# Altium PCB 噪声监测仪.PcbDoc
Units mil, origin at the board's own origin, x right, y up, seen from the top; angles counter-clockwise.
Board outline 6000 x 4000 mil, 2 copper layers (Top Layer, Bottom Layer); 47 components, 64 nets, 190 pads, 7 vias.
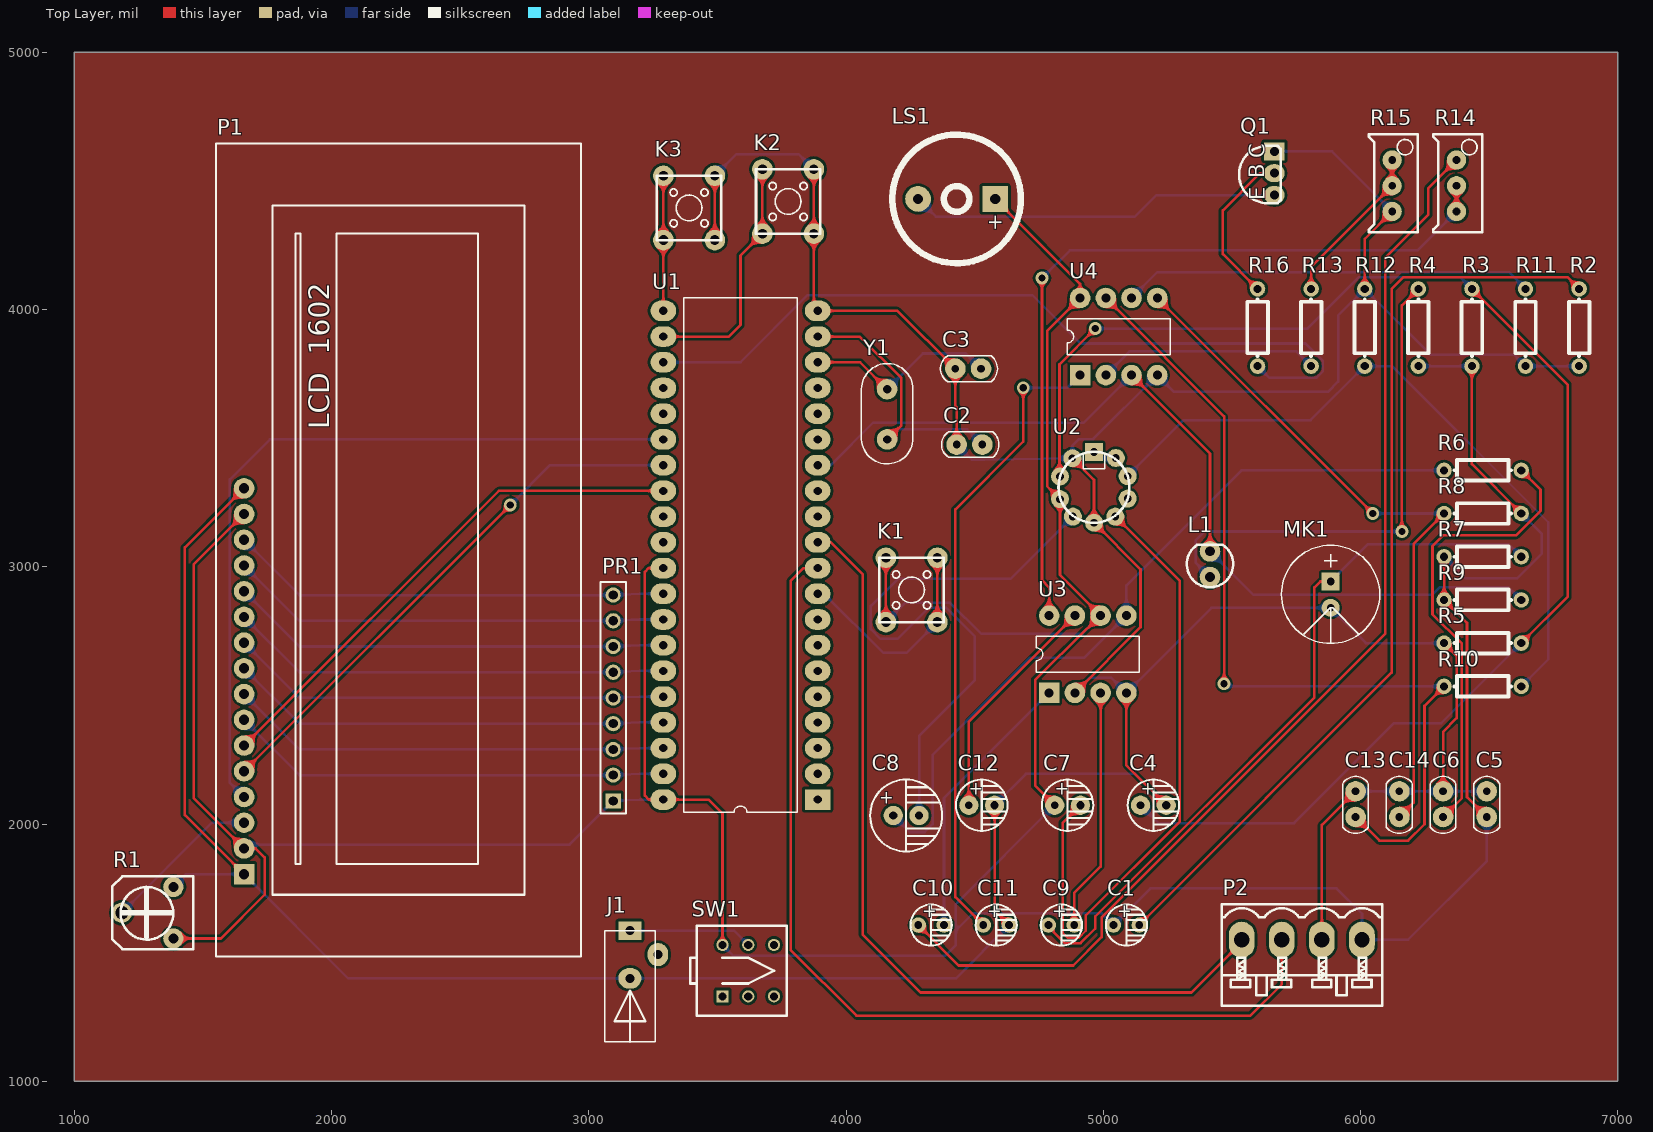
[diagram p0: Top Layer view]
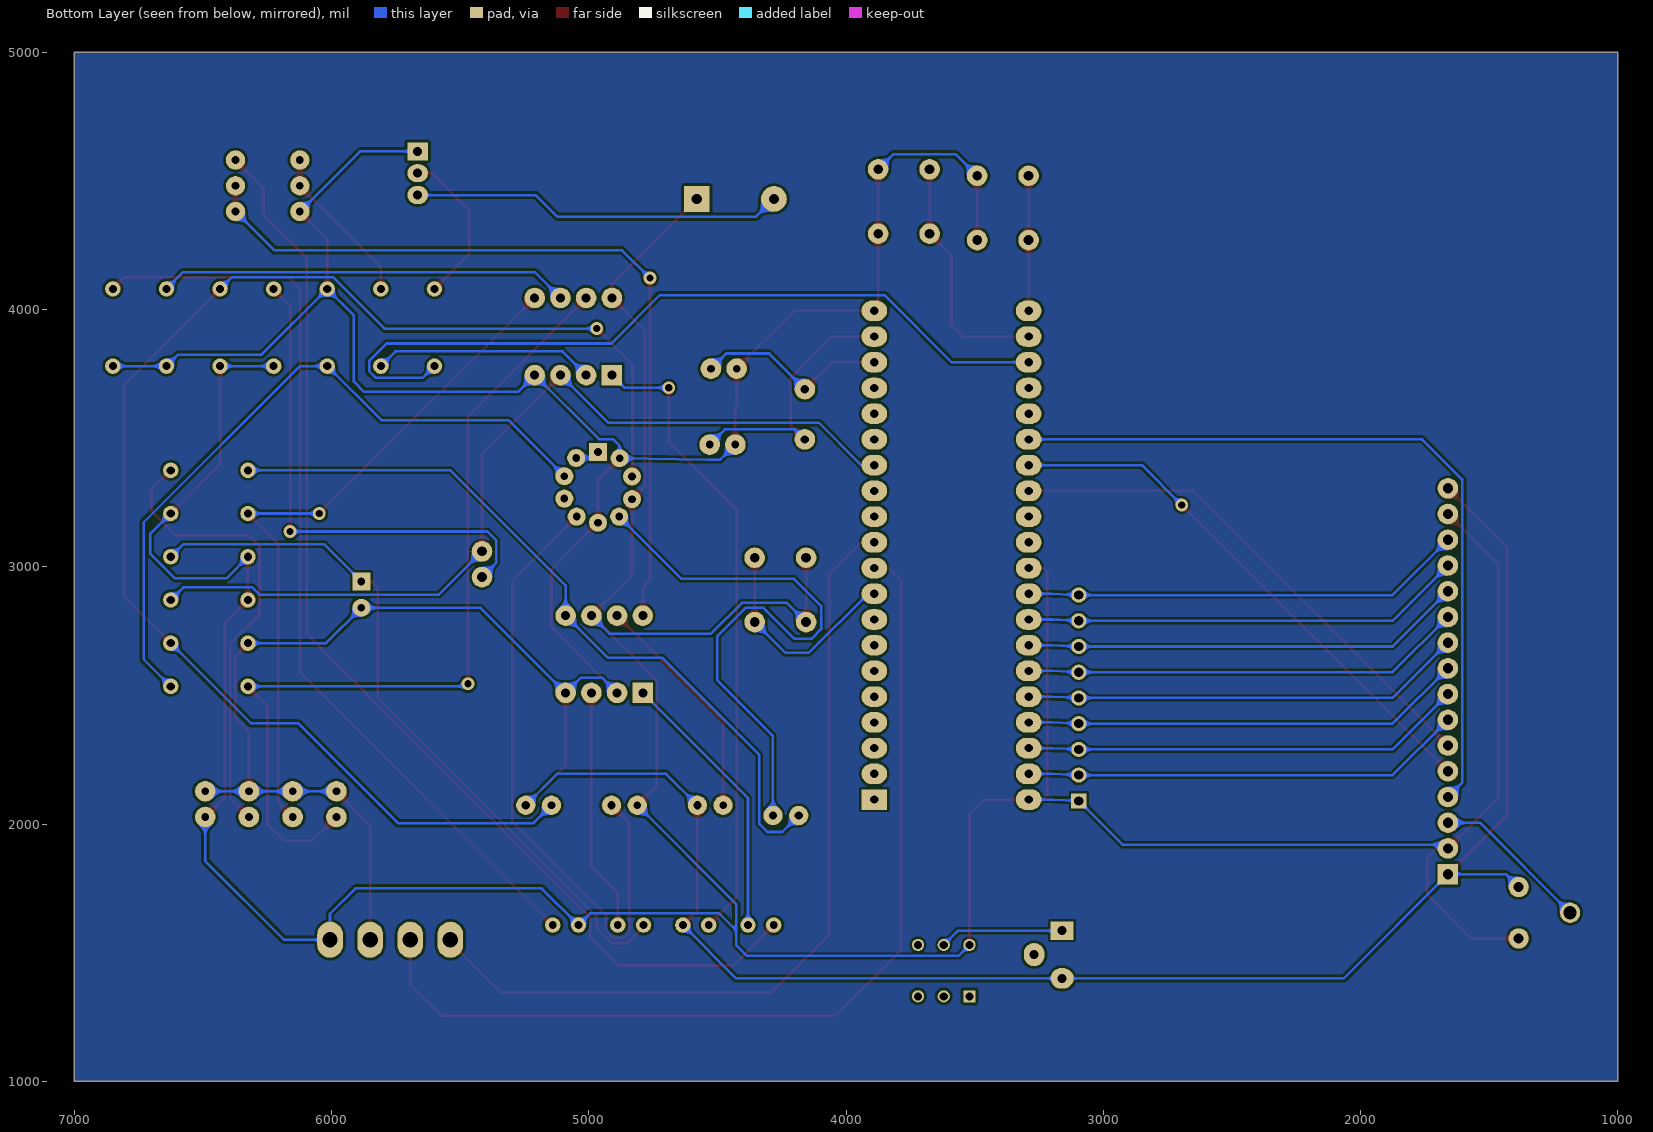
[diagram p1: Bottom Layer view, seen from below]

## Layer stack, top to bottom
Top Solder: solder mask 0.4, Solder Resist, Dk 3.5
Top Layer: signal copper 1.4
Dielectric 1: dielectric 12.6, FR-4, Dk 4.8
Bottom Layer: signal copper 1.4
Bottom Solder: solder mask 0.4, Solder Resist, Dk 3.5

## Board outline
1000,1000 7000,1000 7000,5000 1000,5000

## Design rules (kind name [scope] priority, off if disabled: settings)
Clearance [All] p1: gap=10 ignorepadtopadclearanceinfootprint=FALSE except(0: Arc-Hole Track-Hole SMDPad-Hole THPad-Hole Via-Hole Fill-Hole Poly-Hole Region-Hole Text-Hole)
PolygonConnect [All] p1: connectstyle=Relief reliefconductorwidth=10 reliefentries=4 polygonreliefangle="90 Angle" airgapwidth=10
RoutingVias [All] p1: holewidth=28 width=50 viastyle="Through Hole" minholewidth=28 minwidth=50 maxholewidth=28 maxwidth=50
SolderMaskExpansion [All] p1: expansion=4
Width [All] p1: maxlimit=10 minlimit=10 preferedwidth=10
30 further rules are at their usual default settings.

## Components (designator, comment, footprint, x,y, rotation, side; value= is the part's Value field where it differs from the comment)
C1 "10uF" CAP2 5106.06,1599.25 r0 top
C2 "30p" CAPNORM 4480,3470 r180 top value=33p
C3 "30p" CAPNORM 4475,3765 r180 top value=33p
C4 "1uF" CAP3 5180,2062.87 r0 top
C5 "104" CAPNORM 6486.06,2077.13 r90 top
C6 "473" CAPNORM 6316.06,2077.13 r90 top
C7 "1uF" CAP3 4846.31,2062.87 r0 top
C8 "220uF" CAP4 4235,2040 r0 top
C9 "10uF" CAP2 4853.08,1599.25 r0 top
C10 "10uF" CAP2 4347.13,1599.25 r0 top
C11 "1UF" CAP2 4600.1,1599.25 r0 top
C12 "100uF" CAP3 4512.62,2062.87 r0 top
C13 "104" CAPNORM 5976.06,2077.13 r90 top
C14 "103" CAPNORM 6146.06,2077.13 r90 top
J1 "PWR2.5" PWR5V 3110,1400 r90 top
K1 "SW-AJ" KaiGuan 4245,2915 r90 top
K2 "SW-AJ" KaiGuan 3765,4425 r90 top
K3 "SW-AJ" KaiGuan 3380,4400 r90 top
L1 "LED" LED 5415,3010 r0 top
LS1 "Bell" FengMing 4480,4555 r0 top
MK1 "Mic2" MK1 5885,2895 r0 top
P1 "LCD1602" 1602 2756.81,2949.68 r90 top
P2 "Header 4" HT396K-4 5772.05,1550 r0 top
PR1 "8位排阻" HDR1X9 3095,2090 r90 top
Q1 "8550" SANJIGUAN 5605,4535 r0 top
R1 "" DIANWEIQI 1277.17,1653.27 r90 top value=10K
R2 "10K" AXIAL-0.3 6850,3780 r90 top
R3 "20K" AXIAL-0.3 6433.33,3780 r90 top
R4 "330" AXIAL-0.3 6225,3780 r90 top value=1K
R5 "10K" AXIAL-0.3 6625,2703 r180 top
R6 "10" AXIAL-0.3 6625,3375 r180 top
R7 "100K" AXIAL-0.3 6625,3039 r180 top
R8 "6.8K" AXIAL-0.3 6625,3207 r180 top
R9 "10K" AXIAL-0.3 6625,2871 r180 top
R10 "100K" AXIAL-0.3 6625,2535 r180 top
R11 "100K" AXIAL-0.3 6641.67,3780 r90 top
R12 "10K" AXIAL-0.3 6016.67,3780 r90 top
R13 "22K" AXIAL-0.3 5808.33,3780 r90 top
R14 "100K" Bianzuqi 6311.06,4547.13 r90 top
R15 "10K" Bianzuqi 6061.06,4547.13 r90 top
R16 "1K" AXIAL-0.3 5600,3780 r90 top
SW1 "SW-6P" SW-6P 3520,1330 r90 top
U1 "STC89C52" 52DANPIANJi 3555,3045 r90 top
U2 "AD536" AD536 4965.06,3311.13 r0 top
U3 "LM386" LM386 4877.87,2351.06 r90 top
U4 "LM331AN" LM331AN 4826.06,3937.13 r0 top
Y1 "12M" JINGZHEN 4155,3630 r0 top

## Footprints (in the part's own frame and the unit in brackets; to place one, negate y for a bottom-side part, rotate by r counter-clockwise, add the part's x,y. Pads: shape width x height; smd on the part's side, far side on the other; paste and mask are expansions set on the pad)
52DANPIANJi [mil]
  rect 80x100 hole 32: 1(-950,-335)
  oval 80x100 hole 32: 2(-850,-335) 3(-750,-335) 4(-650,-335) 5(-550,-335) 6(-450,-335) 7(-350,-335) 8(-250,-335) 9(-150,-335) 10(-50,-335) 11(50,-335) 12(150,-335) 13(250,-335) 14(350,-335) 15(450,-335) 16(550,-335) 17(650,-335) 18(750,-335) 19(850,-335) 20(950,-335) 21(950,265) 22(850,265) 23(750,265) 24(650,265) 25(550,265) 26(450,265) 27(350,265) 28(250,265) 29(150,265) 30(50,265) 31(-50,265) 32(-150,265) 33(-250,265) 34(-350,265) 35(-450,265) 36(-550,265) 37(-650,265) 38(-750,265) 39(-850,265) 40(-950,265)
  silkscreen extent -1000,-255 1000,185
1602 [mil]
  rect 80x80 hole 40: 1(-1144.68,1096.81)
  round 80 hole 40: 2(-1044.68,1096.81) 3(-944.69,1096.81) 4(-844.69,1096.81) 5(-744.69,1096.81) 6(-644.69,1096.81) 7(-544.69,1096.81) 8(-444.69,1096.81) 9(-344.69,1096.81) 10(-244.69,1096.81) 11(-144.69,1096.81) 12(-44.69,1096.81) 13(55.31,1096.81) 14(155.31,1096.81) 15(255.31,1096.81) 16(355.31,1096.81)
  silkscreen extent -1465,-213 1695,1207
AD536 [mil]
  round 70 hole 30 unplated: 1(-85.06,110.87) 2(-133.06,39.87) 3(-133.06,-48.13) 4(-83.06,-116.13) 5(-1.06,-139.92) 6(81.94,-116.13) 7(129.94,-46.13) 8(129.94,40.87) 9(83.94,111.87)
  rect 70x70 hole 30 unplated: 10(-1.06,134.87)
  silkscreen extent -139,-140 137,136
AXIAL-0.3 [mil]
  round 60 hole 31.5: 1(0,0) 2(300,0)
  silkscreen extent 40,-40 260,40
Bianzuqi [mil]
  round 75 hole 30: 1(33.94,-62.13) 2(-66.06,-62.13) 3(-166.06,-62.13)
  silkscreen extent -246,-162 134,28
CAP2 [mil]
  round 60 hole 30: 1(-66.06,7.87) 2(33.94,7.87)
  silkscreen extent -96,-72 64,88
CAP3 [mil]
  round 75 hole 30: 1(-35,10)
  round 75 hole 32: 2(65,10)
  silkscreen extent -85,-90 115,110
CAP4 [mil]
  round 75 hole 32: 1(-51.06,-7.13) 2(48.94,-7.13)
  silkscreen extent -141,-147 139,133
CAPNORM [mil]
  round 80 hole 30: 1(50,-5) 2(-50,-5)
  silkscreen extent -114,-55 108,45
DIANWEIQI [mm]
  round 2 hole 1: 1(-2.496,-2.739) 3(2.584,-2.739)
  round 2 hole 1.3: 2(0.044,2.341)
  silkscreen extent -3.56,-4.7 3.64,3.3
FengMing [mil]
  rect 100x100 hole 40: 1(100,-125)
  round 100 hole 40: 2(-200,-125)
  silkscreen extent -300,-375 200,125
HDR1X9 [mm] "Connector; Header; 9 Position"
  rect 1.5x1.5 hole 0.9: 1(0,0)
  round 1.5 hole 0.9: 2(2.54,0) 3(5.08,0) 4(7.62,0) 5(10.16,0) 6(12.7,0) 7(15.24,0) 8(17.78,0) 9(20.32,0)
  silkscreen extent -1.27,-1.27 21.59,1.27
HT396K-4 [mil]
  oval 100x140 hole 60: 1(-233.86,0) 2(-77.95,0) 3(77.95,0) 4(233.86,0)
  silkscreen extent -312,-256 312,138
JINGZHEN [mil]
  round 80 hole 32: 1(5,60) 2(5,-135)
  silkscreen extent -95,-230 105,160
KaiGuan [mil]
  round 80 hole 38: 1(-130,-110) 1(120,-110) 2(-130,90) 2(120,90)
  silkscreen extent -130,-135 120,115
LED [mil]
  round 80 hole 38: 1(0,-50) 2(0,50)
  silkscreen extent -90,-90 90,75
LM331AN [mil]
  rect 80x80 hole 35: 1(83.94,-192.13)
  round 80 hole 35: 2(183.94,-192.13) 3(283.94,-192.13) 4(383.94,-192.13) 5(383.94,107.87) 6(283.94,107.87) 7(183.94,107.87) 8(83.94,107.87)
  silkscreen extent 34,-112 434,28
LM386 [mil]
  rect 80x80 hole 35: 1(158.94,87.87)
  round 80 hole 35: 2(158.94,-12.13) 3(158.94,-112.13) 4(158.94,-212.13) 5(458.94,-212.13) 6(458.94,-112.13) 7(458.94,-12.13) 8(458.94,87.87)
  silkscreen extent 239,-262 379,138
MK1 [mil]
  rect 70x70 hole 30: 1(-1.06,47.87)
  round 70 hole 30: 2(-1.06,-54.49)
  silkscreen extent -192,-193 190,189
PWR5V [mil]
  rect 70.87x90 hole 35: 1(185.22,-50)
  oval 80x90 hole 35: 2(0,-50)
  oval 90x80 hole 35: 3(92.52,-158.82)
  silkscreen extent -247,-148 185,48
SANJIGUAN [mil]
  oval 80x70 hole 35: 1(60,-90) 2(60,-5)
  rect 80x70 hole 35: 3(60,80)
  silkscreen extent -77,-122 85,102
SW-6P [mm]
  rect 1.2x1.2 hole 0.8: 1(0,0)
  round 1.2 hole 0.8: 2(0,-2.54) 3(0,-5.08) 4(5.08,-5.08) 5(5.08,-2.54) 6(5.08,0)
  silkscreen extent -1.91,-6.35 6.98,3.18

## Part data
C1 C4 C7 C8 C9 C10 C11 C12: library part C+
  C1 C9: =10uF
  C4 C7: =1uf
  C8: =220uF
  C10: =10uf
  C11: =1UF
  C12: =100uF
C2 C3 C5 C6 C13 C14: library part CAP
  C5 C13: =104
  C6: =473
  C14: =103
J1: "Low Voltage Power Supply Connector", ComponentLink1Description="Manufacturer Link", ComponentLink1URL=http://domino.kycon.com/internet/Products.html, DatasheetDocument=09-May-2002, Published=17-Dec-2003, Publisher="Altium Limited"
LS1: "Electrical Bell", Manufacturer="Generic Components", Published=1999
MK1: "Microphone", LatestRevisionDate=17-Jul-2002, LatestRevisionNote="Re-released for DXP Platform.", PackageReference=PIN2, Published=24-Mar-1999, Publisher="Altium Limited"
P2: "Header, 4-Pin", LatestRevisionDate=17-Jul-2002, LatestRevisionNote="Re-released for DXP Platform.", Publisher="Altium Limited"
Q1: library part 2N3906, "PNP General Purpose Amplifier", ComponentLink1Description="Manufacturer Link", ComponentLink1URL=http://www.fairchildsemi.com/, ComponentLink2Description=Datasheet, ComponentLink2URL=http://www.fairchildsemi.com/ds/2N%2F2N3906.pdf, DatasheetVersion=1997, LatestRevisionDate=15-Jan-2003, LatestRevisionNote="PCB Footprint 'BCY-W3/D4.7' replaced", PackageDescription="TO, Flat Index; 3 In-Line, Axial Leads; Body Dia. 4.5mm; Leads 0.51 x 0.48 mm (max)", PackageReference=TO-92A, PackageVersion=Sep-1998, Published=8-Jun-2000, Publisher="Altium Limited"
R1 R14 R15: library part RPot, "Potentiometer", LatestRevisionDate=17-Jul-2002, LatestRevisionNote="Re-released for DXP Platform.", PackageDescription="Variable Resistor, Thru-Hole; 3 Leads", PackageReference=VR5, Published=8-Jun-2000, Publisher="Altium Limited", Set Position=0.5, Sim Note="Enter the Resistance value and the set point into parameter fields."
R2 R4 R16: library part Res2, "Resistor", LatestRevisionDate=17-Jul-2002, LatestRevisionNote="Re-released for DXP Platform.", PackageReference=AXIAL-0.4, Published=8-Jun-2000, Publisher="Altium Limited"
R3 R5 R6 R7 R12: library part RES0.4
  R3: =20K
  R5 R12: =10K
  R6: =10
  R7: =100K
R8 R9 R10 R11 R13: library part 电阻
  R8: =6.8K
  R9: =10K
  R10 R11: =100K
  R13: =22K
U1: library part AT89S52_1
U2: library part AD536A
U3: library part LM386M-1, "Low-Voltage Audio Power Amplifier", Code_IPC=SOIC127P600-8, Code_JEDEC=MS-012-AA, ComponentLink1Description="Manufacturer Link", ComponentLink1URL=http://www.national.com/, ComponentLink2Description=Datasheet, ComponentLink2URL=http://www.national.com/ds.cgi/LM/LM386.pdf, ComponentLink3Description="URL Link1", ComponentLink3URL=http://www.national.com/pf/LM/LM386.html, DatasheetVersion=Sep-1997, LatestRevisionDate=13-Apr-2006, LatestRevisionNote="IPC-7351 Footprint Added.", PackageDescription="8-Pin Small Outline Integrated Circuit 1.27 mm Pitch", PackageReference=M08A, PackageVersion=Sep-1997, Published=15-Apr-2002, Publisher="Altium Limited"
U4: "Precision Voltage-to-Frequency Converter", ComponentLink1Description="Manufacturer Link", ComponentLink1URL=http://www.national.com/, ComponentLink2Description=Datasheet, ComponentLink2URL=http://www.national.com/ds.cgi/LM/LM231.pdf, ComponentLink3Description="URL Link1", ComponentLink3URL=http://www.national.com/pf/LM/LM331.html, DatasheetVersion=Jun-1999, LatestRevisionDate=06-Jun-2005, LatestRevisionNote="Stylized 3D Model Added.", Note="Metal case is connected to pin 4 (Ground)", PackageDescription="DIP; 8 Leads; Row Spacing 7.62 mm; Pitch 2.54 mm", PackageReference=N08E, PackageVersion=Sep-1997, Published=15-Apr-2002, Publisher="Altium Limited"
Y1: library part XTAL, "Crystal Oscillator", Manufacturer="Generic Components", Class=Oscillator, Published=08/06/2000, Publisher="Altium Hobart Technology Centre", SubClass="Crystal Oscillator"

## Via types
v1: diameter 50, hole 28, Top Layer to Bottom Layer, 7 vias

## Nets (pads, with @x,y where several pads share a name; then routed paths per layer and width w, separated by ;. In a path a pad name is that pad's centre, name@x,y a point inside that pad or via, vN(x,y) a via of type N, cw(c..) or ccw(c..) an arc to the next point about the centre after c; other vN are vias at no path point)
ALE: U1.30
GND: C2.1 C3.1 C4.2 C5.1 C6.1 C11.2 C12.2 C13.1 C14.1 J1.2 K2.1 K3.1 MK1.2 P1.1 P1.16 P2.3 Q1.3 R1.3 R2.1 R5.2 R11.1 R12.2 R15.3 U1.20 U2.1 U2.5 U3.2 U3.4 U4.4 | length 17696.3
  Top Layer w10: P1.1 1430,2035 1430,3075 P1.16 ; K3.1@3490,4270 K3.1@3490,4520 ; K2.1@3875,4545 3875,4295 3875,3995 U1.20 4200,3995 C3.1 4425,3625 4430,3620 C2.1 ; C12.2 4577.62,1663.54 C11.2 ; U2.1 4964,3338 U2.5 5145,2990.2 5145,2765 U3.2 ; U3.4 5090,2227.87 C4.2 ; P2.3 5850,1996.06 C13.1 ; R12.2 6016.67,4274.54 R15.3 ; C6.1 6321.06,2358.36 6374,2411.3 6374,2654 R5.2
  Bottom Layer w10: R1.3 1435,1805 P1.1 2065,1400 J1.2 4426.92,1400 C11.2 ; K3.1@3490,4520 3574,4604 3816,4604 K2.1@3875,4545 ; C2.1 4489,3416 4539,3416 U2.1 4880,3471 4905,3496 4961,3496 U4.4 5275,3680 5873,3680 5913,3720 5913,3976.33 R12.2 6271.67,3825 6596.67,3825 R11.1 R2.1 ; C12.2 4699.75,2195 5122.87,2195 C4.2 ; U3.2 4949,2569 5031,2569 U3.4 5420.51,2840.51 MK1.2 6021.45,2703 R5.2 ; Q1.3 5889.25,4615 R15.3 ; C13.1 C14.1 C6.1 C5.1
NetC1_2: C1.2 R2.2 | length 3646.3
  Top Layer w10: C1.2 6121,2588.13 6121,4080 6167,4126 6804,4126 R2.2
NetC4_1: C4.1 R3.2 R5.1 U2.2 | length 5604.4
  Top Layer w10: U2.2 4832,3372 4830,3372 4830,3787 v1(4969,3926) ; R3.2 6805,3708.33 6805,2883 R5.1
  Bottom Layer w10: v1(4969,3926) 5794,3926 5993,4125 6388.33,4125 R3.2 ; C4.1 5214.87,2003 5742,2003 6131,2392 6314,2392 R5.1
NetC6_2: C6.2 R6.1 | length 1796.1
  Top Layer w10: C6.2 6394,2100.06 6394,2701 6280,2815 6280,3080 6323,3123 6606,3123 6700,3217 6700,3300 R6.1
NetC7_2: C7.2 U2.6 | length 2500
  Top Layer w10: C7.2 4842,2003.56 4842,1577 4862,1557 4904,1557 4932.02,1585.02 4932.02,1644.6 5298,2010.57 5298,2944 U2.6
NetC8_1: C8.1 R6.2 U3.5 | length 2976
  Bottom Layer w10: C8.1 4247.81,1969 4306,1969 4337,2000 4337,2268 4716,2647 4927,2647 U3.5 5090,2928 5537,3375 R6.2
NetC8_2: C8.2 U2.4 | length 2319.4
  Bottom Layer w10: C8.2 4283.94,2342 4500,2558.06 4500,2730 4390,2840 4320,2840 4200,2720 4135,2720 4097,2758 4097,2848 4202,2953 4640,2953 U2.4
NetC9_1: C9.1 MK1.1 R7.1 | length 2811.8
  Top Layer w10: C9.1 4807,1587.15 4807,1580 4850,1537 4912.29,1537 4969,1593.71 4969,1640.29 5821,2492.29 5821,2920 5843.87,2942.87 MK1.1
  Bottom Layer w10: MK1.1 6029.06,3088 6576,3088 R7.1
NetC9_2: C9.2 U3.3 | length 945.5
  Top Layer w10: C9.2 4887.02,1731 4990,1833.98 U3.3
NetC10_1: C10.1 R14.1 | length 4415.6
  Top Layer w10: C10.1 4438.19,1450 4883.43,1450 4993.43,1560 4993.43,1636.43 6097,2740 6097,4203 6264,4370 6264,4471.87 R14.1
NetC10_2: C10.2 U3.1 | length 1072.3
  Bottom Layer w10: C10.2 4381.06,2101.06 U3.1
NetC11_1: C11.1 U4.1 | length 2484.7
  Top Layer w10: C11.1 4425,1716.17 4425,3223 4689,3487 v1(4689,3696)
  Bottom Layer w10: v1(4689,3696) 4861,3696 U4.1
NetC12_1: C12.1 U3.7 | length 907.9
  Top Layer w10: C12.1 4477.62,2397.62 U3.7
NetC13_2: C13.2 R10.2 U4.7 | length 3449.8
  Top Layer w10: U4.7 5470,3585 v1(5470,2545) ; C13.2 6073.19,1935 6185,1935 6249,1999 6249,2459 R10.2
  Bottom Layer w10: v1(5470,2545) 5480,2535 R10.2
NetC14_2: C14.2 R8.2 U4.5 | length 2714
  Top Layer w10: U4.5 v1(6048,3207) ; C14.2 6207,2083.06 6207,3089 R8.2
  Bottom Layer w10: v1(6048,3207) R8.2
NetJ1_1: J1.1 SW1.5 | length 482.9
  Bottom Layer w10: J1.1 3564.78,1585.22 SW1.5
NetL1_1: L1.1 R4.2 | length 1951.2
  Top Layer w10: v1(6161,3137) 6161,4016 R4.2
  Bottom Layer w10: L1.1 5359,3016 5359,3102 5394,3137 v1(6161,3137)
NetLS1_2: LS1.2 Q1.1 | length 1448.4
  Bottom Layer w10: LS1.2 4349,4361 5123,4361 5207,4445 Q1.1
NetP1_3: P1.3 R1.2 | length 620
  Bottom Layer w10: R1.2 1535,2005 P1.3
NetQ1_2: Q1.2 R16.2 | length 621
  Top Layer w10: R16.2 5465,4215 5465,4385 5610,4530 Q1.2
NetR10_1: R10.1 R12.1 U2.8 | length 2745.2
  Bottom Layer w10: U2.8 5312.67,3569.67 5806.33,3569.67 R12.1 6123,3780 6730,3173 6730,2640 R10.1
NetR11_2: R11.2 U4.6 | length 1600
  Bottom Layer w10: U4.6 5210,4145 6576.67,4145 R11.2
NetR13_1: R13.1 U4.2 | length 860.1
  Bottom Layer w10: U4.2 5102,3837 5751.33,3837 R13.1
NetR13_2: R13.2 R15.1 R15.2 | length 631.5
  Top Layer w10: R13.2 5808.33,4166.21 R15.2 R15.1
NetR14_2: R14.2 R14.3 U3.8 | length 3142.1
  Top Layer w10: v1(4762,4122) 4762,2948 4790,2920 U3.8 ; R14.3 R14.2
  Bottom Layer w10: v1(4762,4122) 4870,4230 6222.13,4230 R14.3
NetU2_9: U2.9 U2.10 | length 94.5
  Bottom Layer w10: U2.10 4987,3423 U2.9
P00: P1.7 PR1.2 U1.39 | length 1719.2
  Bottom Layer w10: P1.7 1875,2190 PR1.2 3198,2195 U1.39
P01: P1.8 PR1.3 U1.38 | length 1719.2
  Bottom Layer w10: P1.8 1875,2290 PR1.3 3198,2295 U1.38
P02: P1.9 PR1.4 U1.37 | length 1719.2
  Bottom Layer w10: P1.9 1875,2390 PR1.4 3198,2395 U1.37
P03: P1.10 PR1.5 U1.36 | length 1719.2
  Bottom Layer w10: P1.10 1875,2490 PR1.5 3198,2495 U1.36
P04: P1.11 PR1.6 U1.35 | length 1719.2
  Bottom Layer w10: P1.11 1875,2590 PR1.6 3198,2595 U1.35
P05: P1.12 PR1.7 U1.34 | length 1719.2
  Bottom Layer w10: P1.12 1875,2690 PR1.7 3198,2695 U1.34
P06: P1.13 PR1.8 U1.33 | length 1719.2
  Bottom Layer w10: P1.13 1875,2790 PR1.8 3198,2795 U1.33
P07: P1.14 PR1.9 U1.32 | length 1719.2
  Bottom Layer w10: P1.14 1875,2890 PR1.9 3198,2895 U1.32
P10: U1.1
P11: U1.2
P12: U1.3
P13: U1.4
P14: U1.5
P15: U1.6
P16: U1.7
P17: U1.8
P20: K3.2 U1.21 | length 525
  Top Layer w10: U1.21 3290,4270 K3.2@3290,4520
P21: K2.2 U1.22 | length 958.8
  Top Layer w10: U1.22 3545,3895 3590,3940 3590,4210 3675,4295 K2.2@3675,4545
P22: R16.1 U1.23 | length 3101.1
  Bottom Layer w10: U1.23 3590,3795 3851,4056 4724,4056 4912,3868 5786,3868 5854,3800 5854,3760 5829,3735 5645,3735 R16.1
P23: U1.24
P24: U1.25
P25: P1.4 U1.26 | length 3007
  Bottom Layer w10: P1.4 1605,2160 1605,3340 1760,3495 U1.26
P26: P1.5 U1.27 | length 2122.9
  Top Layer w10: P1.5 v1(2695,3240)
  Bottom Layer w10: v1(2695,3240) 2850,3395 U1.27
P27: P1.6 U1.28 | length 2040.1
  Top Layer w10: P1.6 2650,3295 U1.28
P30: P2.2 U1.10 | length 3799
  Top Layer w10: U1.10 3835,2995 3785,2945 3785,1510 4040,1255 5572.09,1255 5694.09,1377 P2.2
P31: P2.1 U1.11 | length 3284.5
  Top Layer w10: U1.11 3941,3095 4065,2971 4065,1570 4290,1345 5343.19,1345 5538.19,1540 P2.1
P32: U1.12
P33: U1.13
P34: L1.2 R9.1 U1.14 U4.3 | length 3487.8
  Top Layer w10: U4.3 5415,3440 L1.2
  Bottom Layer w10: U1.14 3941,3395 4106,3560 4925,3560 U4.3 ; L1.2 5583,2892 6280,2892 6308,2920 6576,2920 R9.1
P35: U1.15
P36: U1.16
P37: U1.17
PSEN: U1.29
RST: K1.1 U1.9 | length 860
  Top Layer w10: K1.1@4355,2785 K1.1@4355,3035
  Bottom Layer w10: U1.9 3915,2895 4145,2665 4235,2665 K1.1@4355,2785
VCC: C1.1 C5.2 C7.1 K1.2 LS1.1 P1.2 P1.15 P2.4 PR1.1 R1.1 R3.1 R4.1 R7.2 R8.1 R9.2 SW1.6 U1.31 U1.40 U2.3 U3.6 U4.8 | length 16428.1
  Top Layer w10: R1.1 1570,1555 1740,1725 1740,1870 1705,1905 P1.2 1465,2100 1465,3010 P1.15 ; U1.31 3233,2995 3218,2980 3218,2110 3233,2095 U1.40 3465,2095 3520,2040 SW1.6 ; K1.2@4155,2785 K1.2@4155,3035 ; LS1.1 4910,4100 U4.8 4782,3917 4782,3313 U2.3 4832,2968 U3.6 4785,2610 4735,2560 4735,2149.19 C7.1 ; R7.2 R9.2 6414,2782 6414,2104.19 C5.2 ; R3.1 6433.33,3398.67 R8.1
  Bottom Layer w10: P1.2 1675,1920 2925,1920 PR1.1 3198,2095 U1.40 ; SW1.6 3563,1487 4385,1487 4427,1529 4427,1587 ; K1.2@4155,2785 4230,2860 4405,2860 4525,2740 4920,2740 U3.6 ; C7.1 4427,1688.56 4427,1587 ; R4.1 R3.1 ; R7.2 6409,2955 6608,2955 6705,3052 6705,3127 R8.1 ; C5.2 6491.06,1856.06 6185,1550 P2.4 6005.91,1651.09 5907,1750 5182.87,1750 C1.1 4994.13,1653 4493,1653 4427,1587
X1: C2.2 U1.19 Y1.2 | length 1063.5
  Top Layer w10: U1.19 4053,3895 4215,3733 4215,3550 Y1.2
  Bottom Layer w10: Y1.2 4199,3534 4471,3534 C2.2
X2: C3.2 U1.18 Y1.1 | length 760.5
  Top Layer w10: U1.18 4055,3795 Y1.1
  Bottom Layer w10: Y1.1 4299,3829 4466,3829 C3.2
pads on no net: J1.3 SW1.1 SW1.2 SW1.3 SW1.4 U2.7

## Polygon pours and split planes (outlines as drawn)
no net on Bottom Layer "Top Layer-No Net" (solid, pour order 2): 1000,1000 1000,5000 7000,5000 7000,1000
no net on Top Layer "Top Layer-No Net" (solid, pour order 4): 1000,5000 7000,5000 7000,1000 1000,1000

## Text inside footprints (layer, text, board x,y; h text height)
C1: Top Overlay "+" at 5055,1637.13 h50
C4: Top Overlay "+" at 5145,2112.87 h50
C7: Top Overlay "+" at 4811.31,2112.87 h50
C8: Top Overlay "+" at 4128.94,2077.87 h50
C9: Top Overlay "+" at 4802.02,1637.13 h50
C10: Top Overlay "+" at 4296.06,1637.13 h50
C11: Top Overlay "+" at 4549.04,1637.13 h50
C12: Top Overlay "+" at 4477.62,2112.87 h50
LS1: Top Overlay "+" at 4605,4305 h60 r90
P1: Top Overlay "LCD  1602" at 1991.81,3534.68 h80 r90
Q1: Top Overlay "E" at 5627.5,4425 h60 r90; Top Overlay "B" at 5625,4510 h60 r90; Top Overlay "C" at 5627.5,4587.5 h60 r90